# Altium PCB rhythmpcb.PcbDoc
Units mm, origin at the board's own origin, x right, y up, seen from the top; angles counter-clockwise.
Board outline 132.39 x 75.54 mm, 2 copper layers (Top Layer, Bottom Layer); 30 components, 18 nets, 66 pads, 32 vias.
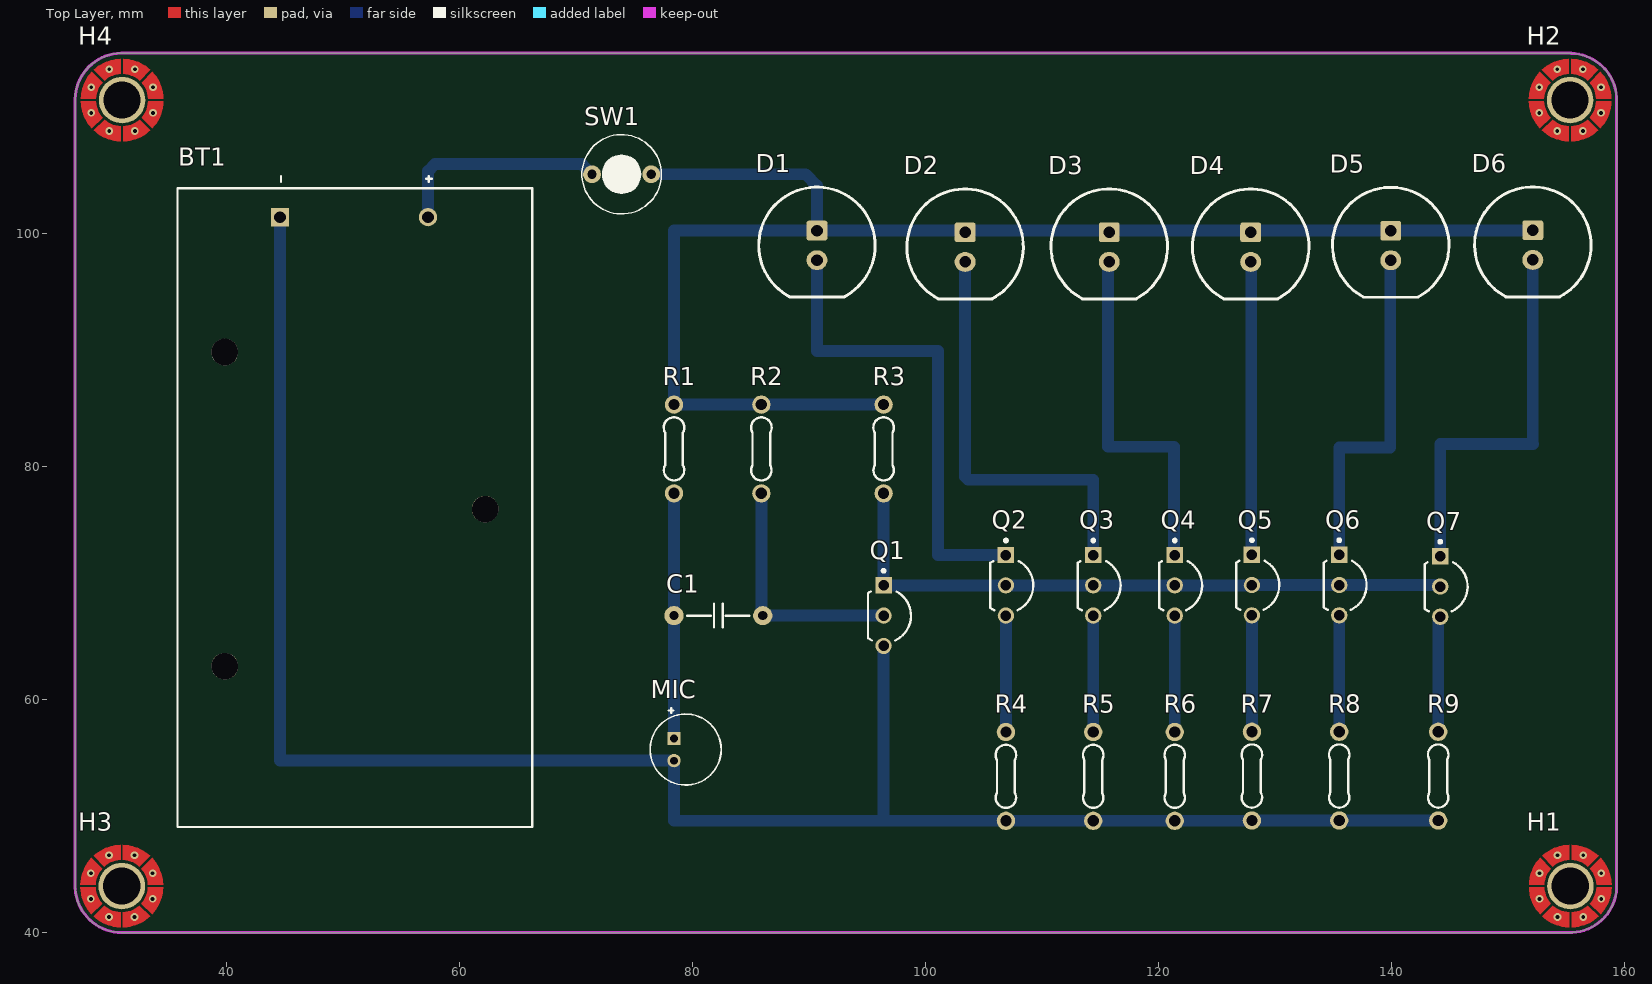
[diagram p0: Top Layer view]
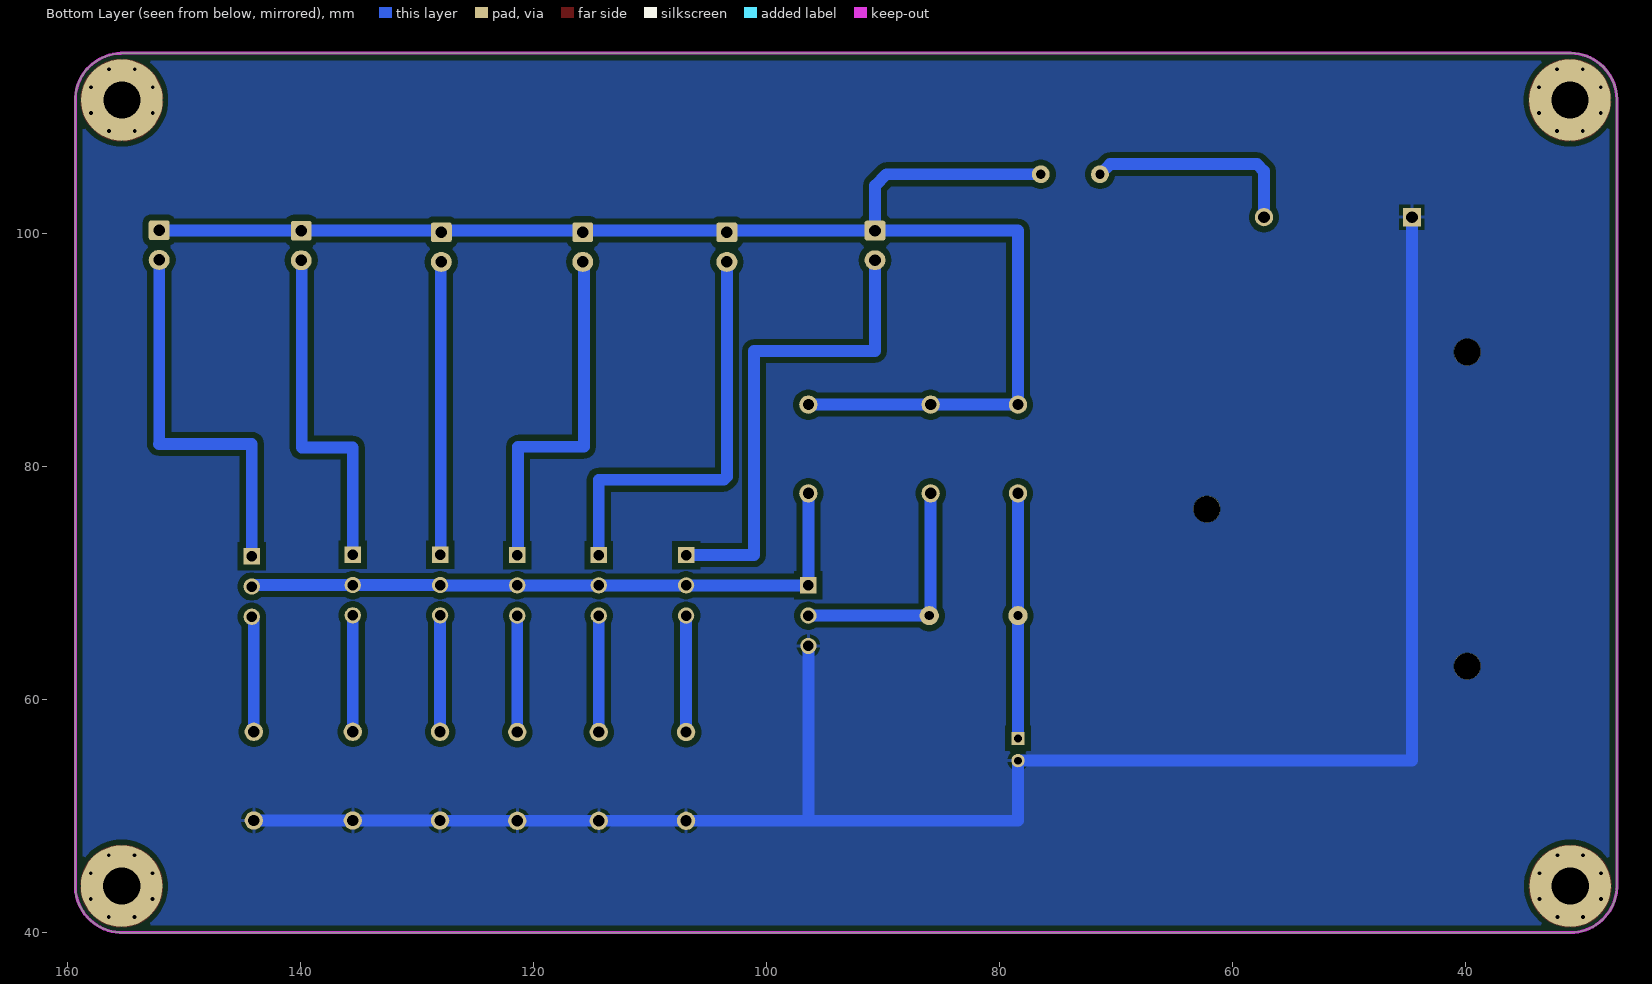
[diagram p1: Bottom Layer view, seen from below]
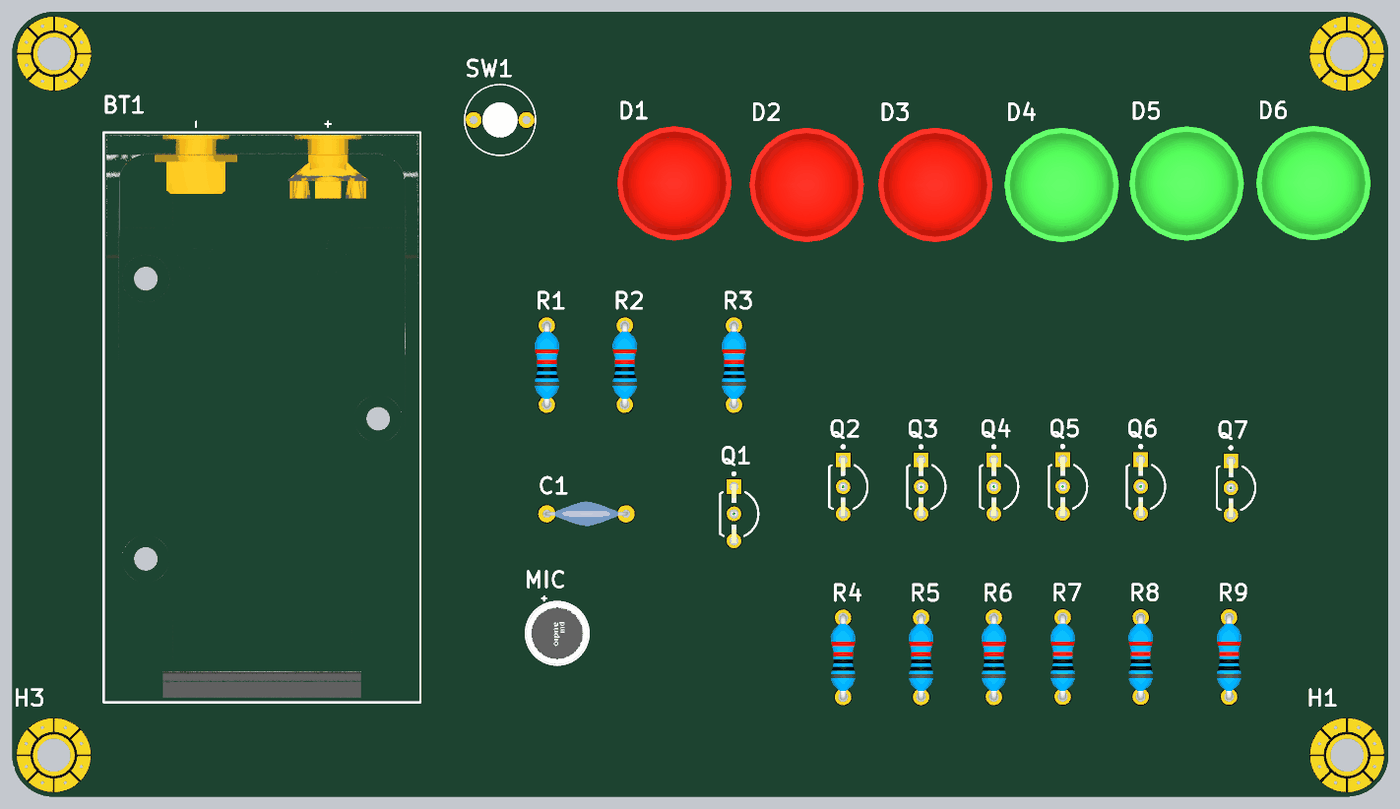
[diagram p2: 3D render of the assembled board from above, using the file's embedded part models]

## Layer stack, top to bottom
Top Solder: solder mask 0.0102, Solder Resist, Dk 3.5
Top Layer: signal copper 0.0356
Dielectric 1: dielectric 0.32, FR-4, Dk 4.8
Bottom Layer: signal copper 0.0356
Bottom Solder: solder mask 0.0102, Solder Resist, Dk 3.5

## Board outline
26.975,43.75 26.975,111.6 26.963,111.6 cw(c31,111.5) 30.9,115.537 30.9,115.525 155.45,115.525 155.45,115.507 cw(c155.35,111.5) 159.35,111.75 159.35,43.8 cw(c155.375,44) 155.549,40.024 155.55,40 30.95,40 cw(c30.975,44)

## Design rules (kind name [scope] priority, off if disabled: settings)
Clearance Clearance_3 [InComponent('H*')] p1: gap=0 ignorepadtopadclearanceinfootprint=FALSE
Clearance Clearance_2 [InNet('ACL*') OR InNet('ACN*')] p2: gap=0.35 ignorepadtopadclearanceinfootprint=FALSE except(0: Arc-Hole Track-Hole SMDPad-Hole THPad-Hole Via-Hole Fill-Hole Poly-Hole Region-Hole Text-Hole)
Clearance Clearance_1 [InPolygon] p3: gap=0.5 ignorepadtopadclearanceinfootprint=FALSE except(0: Arc-Hole Track-Hole SMDPad-Hole THPad-Hole Via-Hole Fill-Hole Poly-Hole Region-Hole Text-Hole)
Clearance [All] p4: gap=0.3 ignorepadtopadclearanceinfootprint=FALSE except(0: Arc-Hole Track-Hole SMDPad-Hole THPad-Hole Via-Hole Fill-Hole Poly-Hole Region-Hole Text-Hole; 0.7: Arc-Fill Arc-Poly Arc-Region Track-Fill Track-Poly Track-Region SMDPad-Fill SMDPad-Poly SMDPad-Region THPad-Fill THPad-Poly THPad-Region Via-Fill Via-Poly Via-Region Fill-Fill Fill-Poly Fill-Region Poly-Poly Poly-Region Region-Region)
ComponentClearance ComponentClearance_1 [InComponent('M802') OR  InComponent('P104') OR InComponent('Y202') OR InComponent('C101') OR InComponent('P101') OR InComponent('L101') OR  InComponent('S309') OR InComponent('S310') OR InComponent('H*')] p1: gap=0 collisioncheckmode=3 verticalgap=0 showdistances=FALSE
ComponentClearance [All] p2: gap=0.254 collisioncheckmode=3 verticalgap=0.254 showdistances=FALSE
Height [All] p1: minheight=0 maxheight=30 prefheight=12.7
PolygonConnect PolygonConnect_1 [IsVia] p1: connectstyle=Direct reliefconductorwidth=0.254 reliefentries=4 polygonreliefangle="90 Angle" airgapwidth=0.254
PolygonConnect PolygonConnect_2 [InNet('GND')] p2: connectstyle=Relief reliefconductorwidth=0.3 reliefentries=4 polygonreliefangle="90 Angle" airgapwidth=0.3
PolygonConnect [All] p3: connectstyle=Relief reliefconductorwidth=0.381 reliefentries=4 polygonreliefangle="90 Angle" airgapwidth=0.635
RoutingVias [All] p1: holewidth=0.4 width=0.8 viastyle="Through Hole" minholewidth=0.3 minwidth=0.6 maxholewidth=2 maxwidth=5
SolderMaskExpansion [All] p1: expansion=0.102 istentingtop=FALSE
SupplyNets "Schematic Supply Nets" [InNet('GND')] p1: voltage=0.000
Width [All] p1: maxlimit=50 minlimit=0.2 preferedwidth=0.3
28 further rules are at their usual default settings.

## Components (designator, comment, footprint, x,y, rotation, side; value= is the part's Value field where it differs from the comment)
BT1 "9V" FP-BH9VPC-MFG 51,76.5 r90 top
C1 "100nF" "CAP Ceramic/W300" 78.4,67.225 r0 top
D1 "LED RED" "LED 10MM - RED" 90.675,99.02 r270 top
D2 "LED RED" "LED 10MM - RED" 103.4,98.87 r270 top
D3 "LED RED" "LED 10MM - RED" 115.775,98.875 r270 top
D4 "LED GREEN" "LED 10MM - GREEN" 127.925,98.87 r270 top
D5 "LED GREEN" "LED 10MM - GREEN" 139.95,99.005 r270 top
D6 "LED GREEN" "LED 10MM - GREEN" 152.15,99.045 r270 top
H1 "Screw Hole" SCREW/3.2/7.0/M 155.375,44 r0 top
H2 "Screw Hole" SCREW/3.2/7.0/M 155.35,111.5 r0 top
H3 "Screw Hole" SCREW/3.2/7.0/M 30.975,44 r0 top
H4 "Screw Hole" SCREW/3.2/7.0/M 31,111.5 r0 top
MIC "POM-3535P-3-R" FP-POM-3535P-3-R-MFG 79.4,55.725 r270 top
Q1 "BC547" ONSC-TO-92-3-29-11_AM_BL 96.4,67.225 r270 top
Q2 "BC547" ONSC-TO-92-3-29-11_AM_BL 106.9,69.825 r270 top
Q3 "BC547" ONSC-TO-92-3-29-11_AM_BL 114.4,69.825 r270 top
Q4 "BC547" ONSC-TO-92-3-29-11_AM_BL 121.4,69.825 r270 top
Q5 "BC547" ONSC-TO-92-3-29-11_AM_BL 128.025,69.85 r270 top
Q6 "BC547" ONSC-TO-92-3-29-11_AM_BL 135.525,69.85 r270 top
Q7 "BC547" ONSC-TO-92-3-29-11_AM_BL 144.2,69.725 r270 top
R1 "20K" "R 1/4W/300" 78.4,77.725 r90 top
R2 "1M" "R 1/4W/300" 85.9,77.725 r90 top
R3 "10K" "R 1/4W/300" 96.4,77.725 r90 top
R4 "22" "R 1/4W/300" 106.9,49.605 r90 top
R5 "22" "R 1/4W/300" 114.4,49.605 r90 top
R6 "22" "R 1/4W/300" 121.4,49.605 r90 top
R7 "22" "R 1/4W/300" 128.025,49.63 r90 top
R8 "22" "R 1/4W/300" 135.525,49.63 r90 top
R9 "22" "R 1/4W/300" 144.025,49.63 r90 top
SW1 "Button" SW/2/DIP 73.9,105.125 r0 top

## Footprints (in the part's own frame and the unit in brackets; to place one, negate y for a bottom-side part, rotate by r counter-clockwise, add the part's x,y. Pads: shape width x height; smd on the part's side, far side on the other; paste and mask are expansions set on the pad)
"CAP Ceramic/W300" [mil]
  round 65 hole 31: 1(0,0) 2(300,0)
  silkscreen extent 45,-40 255,40, body extent -8,-47 307,47, height 340
FP-BH9VPC-MFG [mil]
  rect 61.65x61.65 hole 40 paste-99999 mask+0: 1(982,253)
  round 61.65 hole 40 paste-99999 mask+0: 2(982,-247)
  round 90.16 hole 90.16 unplated paste-99999 mask+0: ""(-536,440) ""(-5,-440) ""(526,440)
  silkscreen extent -1080,-600 1121,600, body extent -1084,-604 1084,604, height 10
FP-POM-3535P-3-R-MFG [mm]
  rect 1.15x1.15 hole 0.65 paste-2539.97 mask+0: 1(-0.95,-1)
  round 1.15 hole 0.65 paste-2539.97 mask+0: 2(0.95,-1)
  silkscreen extent -3.55,-3.05 3.05,3.05, body extent -3.15,-3.15 3.15,3.15, height 0.25
"LED 10MM - GREEN" [mm]
  rrect25% 1.7x1.8 hole 1: 1(-1.27,0)
  oval 1.7x1.8 hole 1: 2(1.27,0)
  silkscreen extent -5,-5 4.44,5, body extent -5.5,-5.5 5.5,5.5, height 14.15
"LED 10MM - RED" [mm]
  rrect25% 1.7x1.8 hole 1: 1(-1.27,0)
  oval 1.7x1.8 hole 1: 2(1.27,0)
  silkscreen extent -5,-5 4.44,5, body extent -5.5,-5.5 5.5,5.5, height 14.15
ONSC-TO-92-3-29-11_AM_BL [mm] "TO, 3-Leads, Body Dia 4.7mm, Pitch 2.6mm"
  rect 1.4x1.4 hole 0.9: 1(-2.6,0)
  round 1.4 hole 0.9: 2(0,0) 3(2.6,0)
  silkscreen extent -3.97,-1.34 2.13,2.35, body extent -2.84,-1.34 2.84,2.35, height 5.33
"R 1/4W/300" [mil] "Through hole resitor, axial 300mils, 1/4W"
  round 62 hole 38: 1(0,0) 2(300,0)
  silkscreen extent 44,-35 257,35, body extent -12,-47 312,47, height 97
SCREW/3.2/7.0/M [mm]
  round 4 / inner round 7 / far side round 7 hole 3.2: 1(0,0)
  Top Layer pour cut-out: -4,0 -3.696,1.531 -2.828,2.828 -1.531,3.695 0,4 0,4 1.531,3.695 2.828,2.828 3.695,1.531 4,0 4,0 3.696,-1.531 2.828,-2.828 1.531,-3.696 0,-4 0,-4 -1.531,-3.696 -2.828,-2.828 -3.696,-1.531 -4,0
  Top Layer region: -2.25,0.1 -2.225,0.325 -2.175,0.575 -2.1,0.8 -2.025,0.975 -1.95,1.125 -1.875,1.25 -1.775,1.375 -1.675,1.5 -2.6,2.425 -2.775,2.225 -2.925,2.025 -3.05,1.825 -3.175,1.6 -3.275,1.375 -3.35,1.175 -3.425,0.95 -3.475,0.725 -3.5,0.6 -3.525,0.45 -3.55,0.1
  Top Layer region: -2.25,-0.1 -2.225,-0.325 -2.175,-0.575 -2.1,-0.8 -2.025,-0.975 -1.95,-1.125 -1.875,-1.25 -1.775,-1.375 -1.675,-1.5 -2.6,-2.425 -2.775,-2.225 -2.925,-2.025 -3.05,-1.825 -3.175,-1.6 -3.275,-1.375 -3.35,-1.175 -3.425,-0.95 -3.475,-0.725 -3.5,-0.6 -3.525,-0.45 -3.55,-0.1
  Top Layer region: -0.1,2.25 -0.325,2.225 -0.575,2.175 -0.8,2.1 -0.975,2.025 -1.125,1.95 -1.25,1.875 -1.375,1.775 -1.5,1.675 -2.425,2.6 -2.225,2.775 -2.025,2.925 -1.825,3.05 -1.6,3.175 -1.375,3.275 -1.175,3.35 -0.95,3.425 -0.725,3.475 -0.6,3.5 -0.45,3.525 -0.1,3.55
  Top Layer region: 0.1,2.25 0.325,2.225 0.575,2.175 0.8,2.1 0.975,2.025 1.125,1.95 1.25,1.875 1.375,1.775 1.5,1.675 2.425,2.6 2.225,2.775 2.025,2.925 1.825,3.05 1.6,3.175 1.375,3.275 1.175,3.35 0.95,3.425 0.725,3.475 0.6,3.5 0.45,3.525 0.1,3.55
  Top Layer region: 2.25,-0.1 2.225,-0.325 2.175,-0.575 2.1,-0.8 2.025,-0.975 1.95,-1.125 1.875,-1.25 1.775,-1.375 1.675,-1.5 2.6,-2.425 2.775,-2.225 2.925,-2.025 3.05,-1.825 3.175,-1.6 3.275,-1.375 3.35,-1.175 3.425,-0.95 3.475,-0.725 3.5,-0.6 3.525,-0.45 3.55,-0.1
  Top Layer region: 2.25,0.1 2.225,0.325 2.175,0.575 2.1,0.8 2.025,0.975 1.95,1.125 1.875,1.25 1.775,1.375 1.675,1.5 2.6,2.425 2.775,2.225 2.925,2.025 3.05,1.825 3.175,1.6 3.275,1.375 3.35,1.175 3.425,0.95 3.475,0.725 3.5,0.6 3.525,0.45 3.55,0.1
  Top Layer region: 0.1,-2.25 0.325,-2.225 0.575,-2.175 0.8,-2.1 0.975,-2.025 1.125,-1.95 1.25,-1.875 1.375,-1.775 1.5,-1.675 2.425,-2.6 2.225,-2.775 2.025,-2.925 1.825,-3.05 1.6,-3.175 1.375,-3.275 1.175,-3.35 0.95,-3.425 0.725,-3.475 0.6,-3.5 0.45,-3.525 0.1,-3.55
  Top Layer region: -0.1,-2.25 -0.325,-2.225 -0.575,-2.175 -0.8,-2.1 -0.975,-2.025 -1.125,-1.95 -1.25,-1.875 -1.375,-1.775 -1.5,-1.675 -2.425,-2.6 -2.225,-2.775 -2.025,-2.925 -1.825,-3.05 -1.6,-3.175 -1.375,-3.275 -1.175,-3.35 -0.95,-3.425 -0.725,-3.475 -0.6,-3.5 -0.45,-3.525 -0.1,-3.55
  Bottom Layer pour cut-out: -4,0 -3.696,1.531 -2.828,2.828 -1.531,3.695 0,4 0,4 1.531,3.695 2.828,2.828 3.695,1.531 4,0 4,0 3.696,-1.531 2.828,-2.828 1.531,-3.696 0,-4 0,-4 -1.531,-3.696 -2.828,-2.828 -3.696,-1.531 -4,0
SW/2/DIP [mil]
  round 60 / inner round 62 / far side round 60 hole 31: 1(-100,0) 2(100,0)
  silkscreen extent -134,-134 134,134, body extent -134,-134 135,135, height 150

## Part data
BT1: library part CMP-136216-000001-1, "BATTERY HOLDER 9V PC PIN", Manufacturer="Memory Protection Devices", Manufacturer Part Number=BH9VPC, Package=0, Automotive=No, Category=Batt, ComponentLink2Description=Datasheet, ComponentLink2URL=http://www.memoryprotectiondevices.com/datasheets/BH9VPC-datasheet.pdf, Conn Orientation=Vertical, Contact Material=Nickel, Device Class L1=Connectors, Device Class L2=unset, Device Class L3=unset, Digikey Description="BATTERY HOLDER 9V PC PIN", Height=21.12mm, Is Female=yes, Lead Free=Yes, Number Of Contacts=2, Octopart=https://octopart.com/bh9vpc-memory+protection+devices-22788154, RoHS=TRUE, Voltage Rating=9V
C1: library part "Capacitor NP", "Capacitor non-pol"
D1 D2 D3 D4 D5 D6: "Typical LED 3-pin 2-color"
MIC: library part CMP-231723-000001-1, "MIC COND ANALOG OMNI -35DB 6MM D", Operating Supply Current=500uA, Package Quantity=100, Resistance=2200R, Voltage Rating=2V, Depth=3.7mm, Diameter=6mm, Direction=Omnidirectional, Height=3.7mm, Impedance=2.2kR, Mount="Through Hole", Output Type=Analog, Packaging=Bulk, Shape=Round, Termination="PC Pins"
Q1 Q2 Q3 Q4 Q5 Q6 Q7: library part CMP-1048-01605-1, "Amplifier Transistor, NPN Silicon, 3-Pin TO-92, Pb-Free, Tape and Reel", Manufacturer="On Semiconductor", PartNumber=BC547BRL1G, ComponentLink1Description="Manufacturer URL", ComponentLink1URL=http://www.onsemi.com/, ComponentLink2Description=Datasheet, ComponentLink2URL=http://www.onsemi.com/pub_link/Collateral/BC546-D.PDF, ComponentLink3Description="Package Specification", ComponentLink3URL=http://www.onsemi.com/pub_link/Collateral/MAC97-D.PDF, DatasheetVersion="Rev. 7", fT Min (MHz)=150, IC Continuous (A)=0.1, Mounting Technology="Through Hole", PackageDescription="3-Pin Transistor Outline, Body 4.825 x 3.685 mm, Pitch 1.27 mm", PackageReference=TO-92-3-29-11_AM_BL, PackageVersion="Rev. AM", Packing="Tape and Reel", Polarity=NPN, RoHS=TRUE
R1 R2 R3 R4 R5 R6 R7 R8 R9: library part Resistor, "Resistor"
SW1: library part "SW SPST", "Tact switch 2 pin"
H1 H2 H3 H4: TYPE=NO-BOM, UNIT PRICE=0

## Via types
v1: diameter 0.66, hole 0.33, Top Layer to Bottom Layer, 32 vias

## Nets (pads, with @x,y where several pads share a name; then routed paths per layer and width w, separated by ;. In a path a pad name is that pad's centre, name@x,y a point inside that pad or via, vN(x,y) a via of type N, cw(c..) or ccw(c..) an arc to the next point about the centre after c; other vN are vias at no path point)
GND: BT1.1 MIC.2 Q1.3 R4.1 R5.1 R6.1 R7.1 R8.1 R9.1 | length 166.3
  Bottom Layer w1.016: BT1.1 44.574,54.775 MIC.2 78.4,49.605 96.4,49.605 ; Q1.3 96.4,49.605 ; R9.1 R8.1 R7.1 128.025,49.605 R6.1 R5.1 R4.1 96.4,49.605
NetBT1_2: BT1.2 SW1.1 | length 18.7
  Bottom Layer w1.016: BT1.2 57.274,105.405 57.869,106 70.485,106 SW1.1
NetC1_1: C1.1 MIC.1 R1.1 | length 21.1
  Bottom Layer w1.016: MIC.1 C1.1 R1.1
NetC1_2: C1.2 Q1.2 R2.1 | length 21
  Bottom Layer w1.016: R2.1 85.9,67.225 C1.2 Q1.2
NetD1_1: D1.1 D2.1 D3.1 D4.1 D5.1 D6.1 R1.2 R2.2 R3.2 SW1.2 | length 125.3
  Top Layer w1.016: R1.2 R1.2@78.4,85.475
  Bottom Layer w1.016: SW1.2 89.7,105.125 90.675,104.15 D1.1 ; R3.2 R2.2 R1.2 78.4,100.29 D1.1 ; D6.1 152.138,100.302 90.688,100.302 D1.1
NetD1_2: D1.2 Q2.1 | length 41.5
  Bottom Layer w1.016: D1.2 90.675,89.95 101.075,89.95 101.075,72.425 Q2.1
NetD2_2: D2.2 Q3.1 | length 36
  Bottom Layer w1.016: D2.2 103.4,79.15 103.65,78.9 114.4,78.9 Q3.1
NetD3_2: D3.2 Q4.1 | length 30.9
  Bottom Layer w1.016: D3.2 115.675,97.505 115.675,81.725 121.325,81.725 121.325,72.425 Q4.1
NetD4_2: D4.2 Q5.1 | length 25.2
  Bottom Layer w1.016: D4.2 127.975,97.55 127.975,72.5 Q5.1 Q5.1@128.05,72.45
NetD5_2: D5.2 Q6.1 | length 29.7
  Bottom Layer w1.016: Q6.1 135.525,81.65 139.9,81.65 139.9,97.735 D5.2
NetD6_2: D6.2 Q7.1 | length 33.4
  Bottom Layer w1.016: Q7.1 144.2,81.975 152.175,81.975 152.15,82 D6.2
NetQ1_1: Q1.1 Q2.2 Q3.2 Q4.2 Q5.2 Q6.2 Q7.2 R3.1 | length 55.6
  Bottom Layer w1.016: R3.1 Q1.1 Q2.2 Q3.2 Q4.2 128.025,69.825 Q5.2 Q6.2 144.025,69.85 Q7.2@144.025,69.75
NetQ2_3: Q2.3 R4.2 | length 10
  Bottom Layer w1.016: R4.2 Q2.3
NetQ3_3: Q3.3 R5.2 | length 10
  Bottom Layer w1.016: R5.2 Q3.3
NetQ4_3: Q4.3 R6.2 | length 10
  Bottom Layer w1.016: R6.2 Q4.3
NetQ5_3: Q5.3 R7.2 | length 10
  Bottom Layer w1.016: R7.2 Q5.3
NetQ6_3: Q6.3 R8.2 | length 10
  Bottom Layer w1.016: R8.2 Q6.3
NetQ7_3: Q7.3 R9.2 | length 9.9
  Bottom Layer w1.016: R9.2 Q7.3@144.025,67.15
pads on no net: BT1. H1.1 H2.1 H3.1 H4.1
copper on no net:
  other v1: 29.875,41.35 32.075,41.35 154.275,41.35 156.475,41.35 28.325,42.9 33.625,42.9 152.725,42.9 158.025,42.9 28.325,45.1 33.625,45.1 152.725,45.1 158.025,45.1 29.875,46.65 32.075,46.65 154.275,46.65 156.475,46.65 29.9,108.85 32.1,108.85 154.25,108.85 156.45,108.85 28.35,110.4 33.65,110.4 152.7,110.4 158,110.4 28.35,112.6 33.65,112.6 152.7,112.6 158,112.6 29.9,114.15 32.1,114.15 154.25,114.15 156.45,114.15

## Polygon pours and split planes (outlines as drawn)
GND on Bottom Layer "GND_L02_P000" (solid, remove dead copper, pour order 0): 27,115.45 27.225,115.675 159.45,115.675 159.45,39.9 159.325,40.025 26.775,40.025

## Keep-outs
Keep-Out Layer:
  lines w0.254: 26.963,111.6 cw(c31,111.5) 30.9,115.537 ; 26.975,43.75 26.975,111.6 ; 26.983,43.75 ccw(c30.975,44) 30.95,40 155.55,40 ; 30.9,115.525 155.45,115.525 ; 155.45,115.507 cw(c155.35,111.5) 159.35,111.75 159.35,43.8 cw(c155.375,44) 155.549,40.024